# Altium PCB BeetleMeterV2.PcbDoc
Units mm, origin at the board's own origin, x right, y up, seen from the top; angles counter-clockwise.
Board outline 16 x 15 mm, 2 copper layers (Top Layer, Bottom Layer); 17 components, 11 nets, 47 pads, 13 vias.
Unrouted connection lines stored in the file: 3.
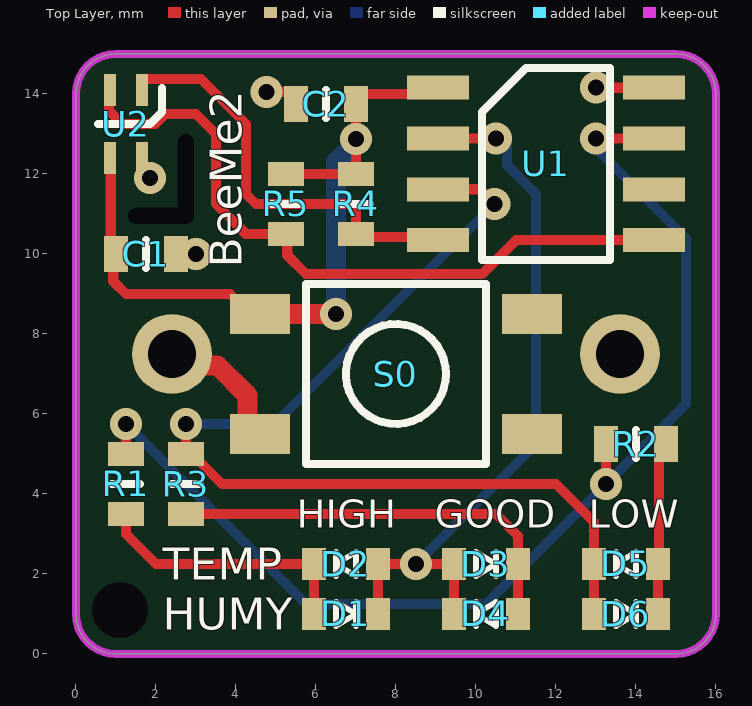
[diagram p0: Top Layer view]
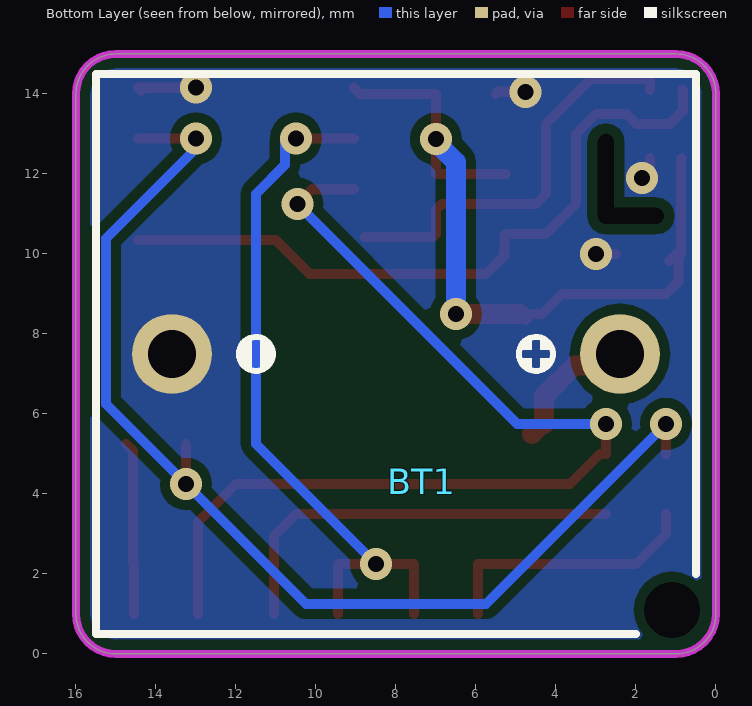
[diagram p1: Bottom Layer view, seen from below]
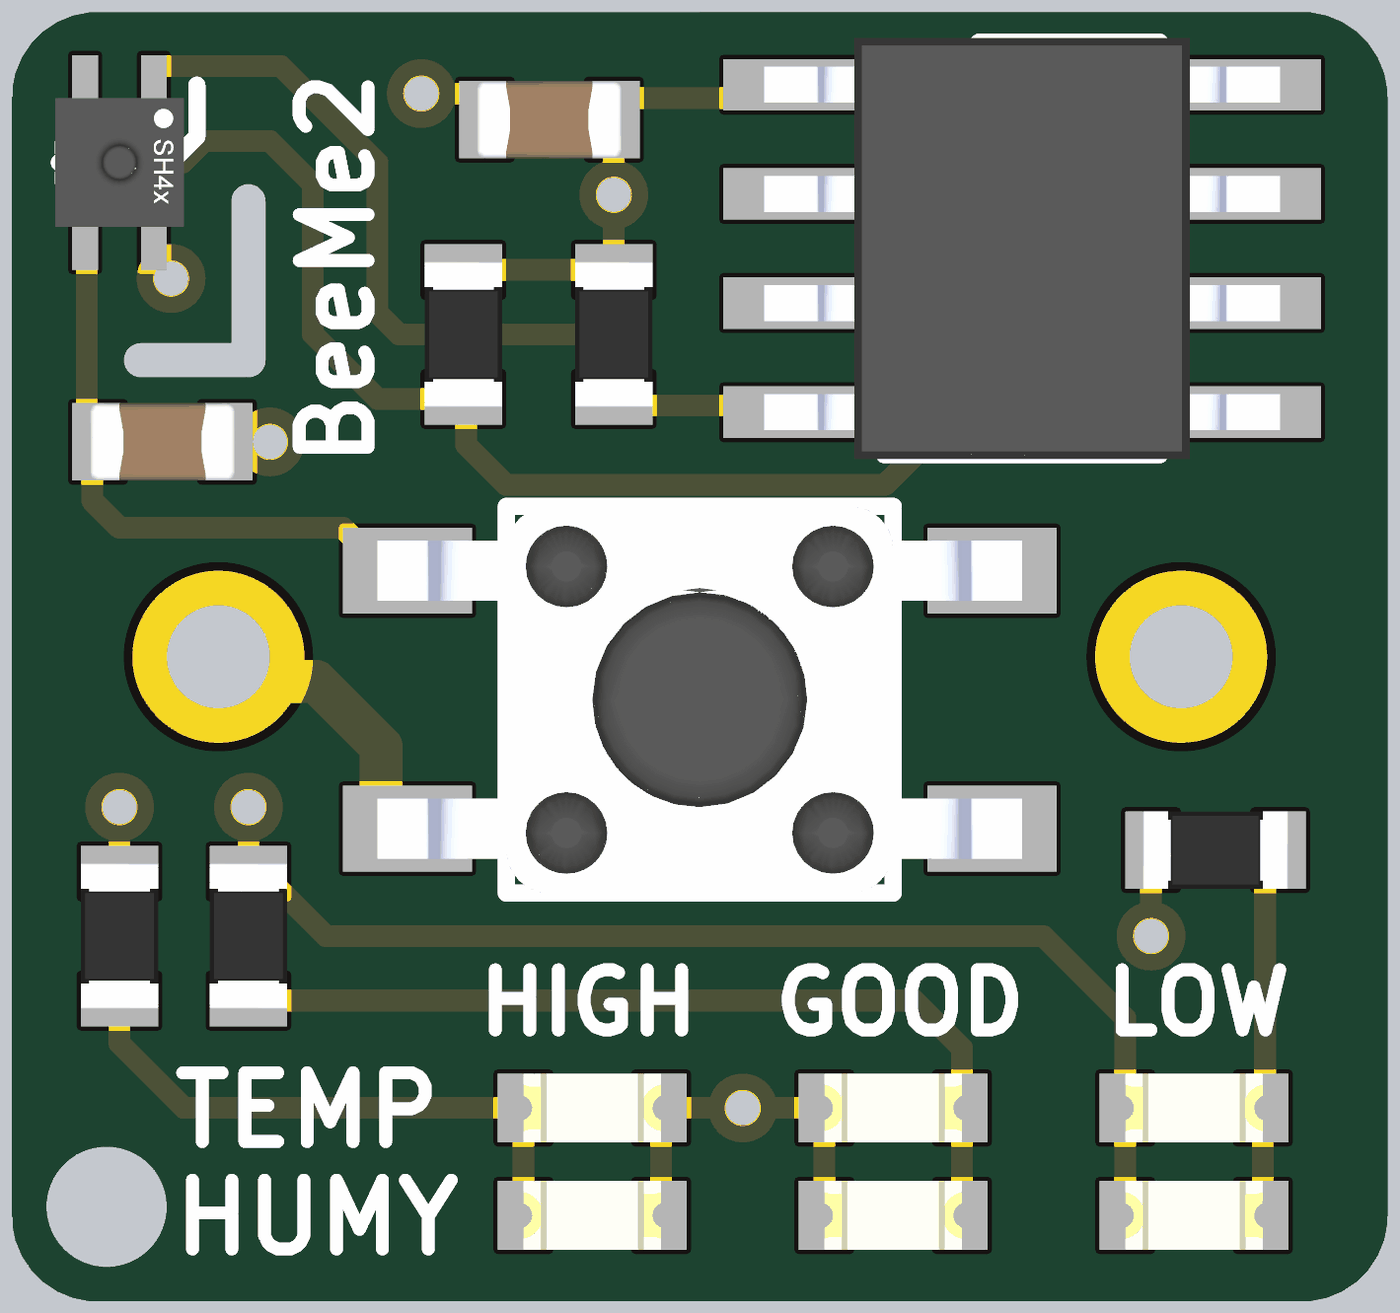
[diagram p2: 3D render of the assembled board from above, using the file's embedded part models]

## Layer stack, top to bottom
Top Solder: solder mask 0.0102, Solder Resist, Dk 3.5
Top Layer: signal copper 0.0356
Dielectric 1: dielectric 0.32, FR-4, Dk 4.8
Bottom Layer: signal copper 0.0356
Bottom Solder: solder mask 0.0102, Solder Resist, Dk 3.5

## Board outline
0,1 0,14 cw(c1,14) 1,15 15,15 cw(c15,14) 16,14 16,1 cw(c15,1) 15,0 1,0 cw(c1,1)

## Design rules (kind name [scope] priority, off if disabled: settings)
Clearance [All] p1: gap=0.254 ignorepadtopadclearanceinfootprint=FALSE except(0: Arc-Hole Track-Hole SMDPad-Hole THPad-Hole Via-Hole Fill-Hole Poly-Hole Region-Hole Text-Hole)
PolygonConnect [All] p1: connectstyle=Direct reliefconductorwidth=0.254 reliefentries=4 polygonreliefangle="90 Angle" airgapwidth=0.254
RoutingVias [All] p1: holewidth=0.711 width=1.27 viastyle="Through Hole" minholewidth=0.711 minwidth=1.27 maxholewidth=0.711 maxwidth=1.27
SilkToSilkClearance [All] p1: silktosilkclearance=0.15
SilkToSolderMaskClearance [IsPad] p1: minsilkscreentomaskgap=0.15 clearancetoexposedcopper=TRUE
SolderMaskExpansion [All] p1: expansion=0.102 istentingtop=FALSE
Width [All] p1: maxlimit=1 minlimit=0.2 preferedwidth=0.254
28 further rules are at their usual default settings.

## Components (designator, comment, footprint, x,y, rotation, side; value= is the part's Value field where it differs from the comment)
BT1 "AG13" AG13 8,7.5 r270 bottom locked value=2*LR44
C1 "Capacitor" 0603C 1.75,10 r180 top value=1u
C2 "Capacitor" 0603C 6.25,13.75 r180 top value=1u
D1 "LED" 0603D 6.75,1 r0 top
D2 "LED" 0603D 6.75,2.25 r180 top
D3 "LED" 0603D 10.25,2.25 r0 top
D4 "LED" 0603D 10.25,1 r180 top
D5 "LED" 0603D 13.75,2.25 r180 top
D6 "LED" 0603D 13.75,1 r0 top
R1 "Resistor" 0603R 1.25,4.25 r90 top value=0603
R2 "Resistor" 0603R 14,5.25 r180 top value=0603
R3 "Resistor" 0603R 2.75,4.25 r270 top value=0603
R4 "Resistor" 0603R 7,11.25 r90 top value=10k
R5 "Resistor" 0603R 5.25,11.25 r90 top value=10k
S0 "Switch" SW_4.5*4.5 8,7 r180 top value=6*6
U1 "ATtiny202/402" SOP-8 11.75,12.25 r270 top value=ATtiny402
U2 "SHT40" DFN-4-EP(1.5x1.5) 1.25,13.25 r270 top

## Footprints (in the part's own frame and the unit in brackets; to place one, negate y for a bottom-side part, rotate by r counter-clockwise, add the part's x,y. Pads: shape width x height; smd on the part's side, far side on the other; paste and mask are expansions set on the pad)
0603C [mm] "0603/1608 SMD general footprint"
  rect 0.6x0.9 smd mask+0.05: 1(-0.75,0) 2(0.75,0)
  silkscreen extent 0,-0.35 0,0.35, body extent -0.85,-0.45 0.85,0.45, height 0.9
0603D [mm] "0603/1608 SMD LED general footprint"
  rect 0.6x0.8 smd mask+0.05: 1(-0.8,0) 2(0.8,0)
  silkscreen extent -0.25,-0.3 0.25,0.3, body extent -0.8,-0.4 0.8,0.4, height 0.55
0603R [mm] "0603/1608 SMD general footprint"
  rect 0.6x0.9 smd mask+0.05: 1(-0.75,0) 2(0.75,0)
  silkscreen extent 0,-0.35 0,0.35, body extent -0.85,-0.45 0.85,0.45, height 0.55
AG13 [mm]
  round 2 hole 1.2: 1(0,5.6) 2(0,-5.6)
  round 0 hole 1.4 unplated mask+0.05: 10(6.4,6.9)
  silkscreen extent -7,-7.5 7,7.5, body extent -7,-7.5 7,7.5, height 12.3
DFN-4-EP(1.5x1.5) [mm]
  rect 0.8x0.3 smd mask+0.05: 1(-0.85,0.4) 2(-0.85,-0.4) 3(0.85,-0.4) 4(0.85,0.4)
  silkscreen extent -0.9,-0.7 0,0.9, body extent -0.75,-0.75 0.75,0.75, height 0.56
SOP-8 [mm] "General footprint for SOP-8 1.27mm pitch 6.2x5"
  rect 0.6x1.55 smd mask+0.05: 1(-1.905,-2.7) 2(-0.635,-2.7) 3(0.635,-2.7) 4(1.905,-2.7) 5(1.905,2.7) 6(0.635,2.7) 7(-0.635,2.7) 8(-1.905,2.7)
  silkscreen extent -2.4,-1.6 2.4,1.6, body extent -2.45,-3 2.45,3, height 1.75
SW_4.5*4.5 [mm]
  rect 1.5x1 smd mask+0.05: 1(-3.4,1.5) 1(3.4,1.5) 2(-3.4,-1.5) 2(3.4,-1.5)
  silkscreen extent -2.25,-2.25 2.25,2.25, body extent -3.75,-2.25 3.75,2.25, height 3.8

## Part data
BT1: library part "Battery 3V", "Coin cell battery 3V"
C1 C2: "Capacitor 1uF"
D1 D2 D3 D4 D5 D6: "General LED symbol"
R1 R2 R3 R4 R5: library part RES
S0: library part Switch-2, "2-positions switch open-closed"
U1: "tiny AVR 8-pin microcontroller"
U2: "SHT40 temperature and humidity sensor"

## Free pads (board coordinates)
  oval 1.5x0.3 hole 0.4 slot 1.6 at 0 deg unplated mask+0.05: 0(2.1,10.95)
  oval 0.3x2.15 hole 0.4 slot 2.25 at 90 deg unplated mask+0.05: 0(2.75,11.875)

## Via types
v1: diameter 0.8, hole 0.4, Top Layer to Bottom Layer, tented both sides, 13 vias

## Nets (pads, with @x,y where several pads share a name; then routed paths per layer and width w, separated by ;. In a path a pad name is that pad's centre, name@x,y a point inside that pad or via, vN(x,y) a via of type N, cw(c..) or ccw(c..) an arc to the next point about the centre after c; other vN are vias at no path point)
3V: BT1.1 S0.1 | length 3.4
  Top Layer w0.5: BT1.1 2.687,7.213 3.537,7.213 4.293,6.457 4.293,5.75 4.35,5.75 S0.1@4.6,5.5
GND: BT1.2 C1.1 C2.2 U1.8 U2.4 | length 3.7
  Top Layer w0.254: U2.4 1.65,12.15 1.85,11.95 v1(1.85,11.9) ; C1.1 v1(3,10) ; v1(4.761,14.052) 5.448,14.052 C2.2@5.5,14 ; v1@12.75,14.155 U1.8 U1.8@14.372,14.078
  other v1: 13,14.155
HIGH: D1.1 D2.2 R1.1 | length 6.8
  Top Layer w0.254: R1.1 1.25,3 2,2.25 D2.2 D1.1
LOW: D5.1 D6.2 R2.1 | length 4.3
  Top Layer w0.254: D6.2 D5.1 ; D5.1@14.577,2.25 14.577,5.077 R2.1
MID: D3.2 D4.1 R3.2 | length 10.5
  Top Layer w0.254: R3.2 10.5,3.5 11.05,2.95 D3.2 D4.1
PA3: R1.2 R2.2 U1.7 | length 29.1
  Top Layer w0.254: R1.2 v1(1.25,5.75) ; v1@12.75,12.885 U1.7 ; v1(13.25,4.25) R2.2
  Bottom Layer w0.254: v1(1.25,5.75) 5.75,1.25 10.25,1.25 v1(13.25,4.25) 15.25,6.25 15.25,10.385 v1@12.75,12.885
  other v1: 13,12.885
PA6: D1.2 D2.1 D3.1 D4.2 U1.2 | length 18.3
  Top Layer w0.254: D1.2 D2.1 v1(8.5,2.25) D3.1 D4.2 ; U1.2 v1@10.75,12.885
  Bottom Layer w0.254: v1(8.5,2.25) 11.5,5.25 11.5,11.5 10.774,12.226 10.774,12.861 v1@10.75,12.885
  other v1: 10.5,12.885
PA7: D5.2 D6.1 R3.1 U1.3 | length 25.5
  Top Layer w0.254: v1(2.75,5.75) R3.1 2.9,5 3.65,4.25 12,4.25 12.95,3.3 D5.2 D6.1 ; U1.3 10.099,11.615 v1@10.464,11.25
  Bottom Layer w0.254: v1(2.75,5.75) 4.965,5.75 v1(10.465,11.25)
SCL: R5.1 U1.5 U2.2 | length 17.7
  Top Layer w0.254: U2.2 0.827,14.077 0.827,13.577 1.154,13.25 1.986,13.25 2.236,13.5 3,13.5 3.5,13 3.5,11.25 4.246,10.504 ; 4.25,10.5 R5.1 5.282,10.468 5.282,9.968 5.75,9.5 10.155,9.5 11,10.345 U1.5
SDA: R4.1 U1.4 U2.1 | length 10.4
  Top Layer w0.254: U2.1 1.65,14.35 1.673,14.373 3.127,14.373 4.25,13.25 4.25,11.5 4.5,11.25 6.851,11.25 7,11.101 R4.1 7.078,10.422 U1.4@8.782,10.422
VCC: C1.2 C2.1 R4.2 R5.2 S0.2 U1.1 U2.3 | length 19.8
  Top Layer w0.254: U2.3 0.869,12.381 0.869,10 0.932,9.937 0.932,9.318 1.25,9 3.85,9 4.35,8.5 4.6,8.5 4.75,8.35 S0.2@4.9,8.5 ; C1.2 C1.2@1.173,9.827 ; R5.2 R4.2 v1(7,12.875) C2.1 7,14 8.895,14 U1.1
  Top Layer w0.5: S0.2@4.9,8.5 v1(6.5,8.5)
  Bottom Layer w0.5: v1(6.5,8.5) 6.5,12.294 7,12.794 v1(7,12.875)
pads on no net: BT1.10 U1.6

## Polygon pours and split planes (outlines as drawn)
GND on Bottom Layer "GND_L02_P000" (solid, remove dead copper, pour order 0): 0,0 16,0 16,15 0,15

## Keep-outs
Keep-Out Layer:
  the board outline again, w0.2

## Silkscreen, mask and mechanical layers (free items; w line width, h text height)
Top Overlay:
  text "BeeMe2" at 4.15,9.65 h0.8 r90
  text "HIGH" at 5.525,3.15 h0.7
  text "GOOD" at 8.967,3.15 h0.7
  text "LOW" at 12.817,3.15 h0.7
  text "TEMP" at 2.168,1.85 h0.8
  text "HUMY" at 2.168,0.6 h0.8